# EAGLE board CT_schematic (EAGLE 7.6.0)

Size 100 x 80 mm. Coordinates in mm from the lower left corner, seen from the top.
Outline: 0,0 100,0 100,80 0,80 0,0
Copper layers (1*16): Top 0.035mm / dielectric 1.5mm / Bottom 0.035mm
Design rules "default": minimum track width 10mil, minimum drill 24mil, track to track 8mil, track to pad 8mil, pad to pad 8mil, via to via 8mil, smd to smd 8mil, copper to edge 40mil, drill to drill 8mil, minimum pad ring 10mil, minimum via ring 8mil, stop-mask expansion 4mil, vias tented up to drill 0mil, thermal gap 10mil

## Footprints (pad centres in the part's own frame; a part is rotated, then mirrored left to right if it is on the bottom)
C0603 = smd 0.8 x 0.8: 1 -0.762,0; 2 0.762,0
C0402 = smd 0.5 x 0.5: 1 -0.508,0; 2 0.508,0
C0805 = smd 1.2 x 1.3: 1 -1.016,0; 2 1.016,0
C1206 = smd 1.3 x 1.6: 1 -1.524,0; 2 1.524,0
L0603 = smd 0.8 x 0.8: 1 -0.762,0; 2 0.762,0
DR1040 = smd 1.6 x 3.2: 1 -4.458,0; 2 4.458,0
R0603 = smd 0.8 x 0.8: 1 -0.762,0; 2 0.762,0
LQFP100 = smd 0.3 x 1.2: 1 -6,-7.75; 2 -5.5,-7.75; 3 -5,-7.75; 4 -4.5,-7.75; 5 -4,-7.75; 6 -3.5,-7.75; 7 -3,-7.75; 8 -2.5,-7.75; 9 -2,-7.75; 10 -1.5,-7.75; 11 -1,-7.75; 12 -0.5,-7.75; 13 0,-7.75; 14 0.5,-7.75; 15 1,-7.75; 16 1.5,-7.75; 17 2,-7.75; 18 2.5,-7.75; 19 3,-7.75; 20 3.5,-7.75; 21 4,-7.75; 22 4.5,-7.75; 23 5,-7.75; 24 5.5,-7.75; 25 6,-7.75; 51 6,7.75; 52 5.5,7.75; 53 5,7.75; 54 4.5,7.75; 55 4,7.75; 56 3.5,7.75; 57 3,7.75; 58 2.5,7.75; 59 2,7.75; 60 1.5,7.75; 61 1,7.75; 62 0.5,7.75; 63 0,7.75; 64 -0.5,7.75; 65 -1,7.75; 66 -1.5,7.75; 67 -2,7.75; 68 -2.5,7.75; 69 -3,7.75; 70 -3.5,7.75; 71 -4,7.75; 72 -4.5,7.75; 73 -5,7.75; 74 -5.5,7.75; 75 -6,7.75 | smd 1.2 x 0.3: 26 7.75,-6; 27 7.75,-5.5; 28 7.75,-5; 29 7.75,-4.5; 30 7.75,-4; 31 7.75,-3.5; 32 7.75,-3; 33 7.75,-2.5; 34 7.75,-2; 35 7.75,-1.5; 36 7.75,-1; 37 7.75,-0.5; 38 7.75,0; 39 7.75,0.5; 40 7.75,1; 41 7.75,1.5; 42 7.75,2; 43 7.75,2.5; 44 7.75,3; 45 7.75,3.5; 46 7.75,4; 47 7.75,4.5; 48 7.75,5; 49 7.75,5.5; 50 7.75,6; 76 -7.75,6; 77 -7.75,5.5; 78 -7.75,5; 79 -7.75,4.5; 80 -7.75,4; 81 -7.75,3.5; 82 -7.75,3; 83 -7.75,2.5; 84 -7.75,2; 85 -7.75,1.5; 86 -7.75,1; 87 -7.75,0.5; 88 -7.75,0; 89 -7.75,-0.5; 90 -7.75,-1; 91 -7.75,-1.5; 92 -7.75,-2; 93 -7.75,-2.5; 94 -7.75,-3; 95 -7.75,-3.5; 96 -7.75,-4; 97 -7.75,-4.5; 98 -7.75,-5; 99 -7.75,-5.5; 100 -7.75,-6
WSON-6 = smd 0.4 x 0.6: 1 -1,-1.4; 2 0,-1.4; 3 1,-1.4; 4 1,1.4; 5 0,1.4; 6 -1,1.4 | drill 0.2 pad 0.3: P$1 0.95,0; P$2 -0.95,0; P$3 0,-0.5; P$4 0,0.5 | smd 2.4 x 1.5: PAD 0,0
SAMTEC_FTSH-105-01-L-DV-K = smd 0.762 x 2.794: 1 -2.54,-2.032; 2 -2.54,2.032; 3 -1.27,-2.032; 4 -1.27,2.032; 5 0,-2.032; 6 0,2.032; 7 1.27,-2.032; 8 1.27,2.032; 9 2.54,-2.032; 10 2.54,2.032
M10382 = smd 1 x 1: 1 0,0; 2 -1.6,0; 3 -3.2,0; 4 -3.2,-2; 5 -3.2,-3.6; 6 -3.2,-5.2; 7 -3.2,-6.8; 8 -3.2,-8.4; 9 -3.2,-10; 10 -3.2,-11.6; 11 -3.2,-13.2; 12 -3.2,-14.8; 13 -3.2,-16.4; 14 -3.2,-18; 15 -3.2,-19.6; 16 -3.2,-21.2; 17 -3.2,-22.8; 18 -0.55,-22.8; 19 1.05,-22.8; 20 2.65,-22.8; 21 5.3,-22.8; 22 5.3,-21.2; 23 5.3,-19.6; 24 5.3,-18; 25 5.3,-16.4; 26 5.3,-14.8; 27 5.3,-13.2; 28 5.3,-11.6; 29 5.3,-10; 30 5.3,-8.4; 31 5.3,-6.8; 32 5.3,-5.2; 33 5.3,-3.6; 34 5.3,-2; 35 5.3,0; 36 3.7,0
RFM75-S = smd 0.85 x 1.6: 1 1.7,0.8; 2 2.97,0.8; 3 4.24,0.8; 4 5.51,0.8; 5 6.78,0.8; 6 8.05,0.8; 7 9.32,0.8; 8 10.59,0.8
FCI_10118193-0001LF = smd 0.4 x 1.35: 1 -1.3,2.675; 2 -0.65,2.675; 3 0,2.675; 4 0.65,2.675; 5 1.3,2.675 | smd 1.6 x 1.4: 6 -3.2,2.45; 7 3.2,2.45 | smd 1.9 x 1.9: 8 -1.2,0; 9 1.2,0 | hole 0.5: -3.3,0; 3.3,0
SOT143B = smd 1 x 0.7: 1 -0.75,-1 | smd 0.6 x 0.7: 2 0.95,-1; 3 0.95,1; 4 -0.95,1
ABS07-32.768KHZ-7-T = smd 1.1 x 2.4: 1 -2.5,0; 2 0,0
ABLS-25.000MHZ-B2F-T = smd 5.6 x 2.8: 1 -3.81,0; 2 5.69,0
TSOT-23-5 = smd 1.3 x 0.62: 1 -1.31,0.95; 2 -1.31,0; 3 -1.31,-0.95; 4 1.31,-0.95; 5 1.31,0.95
DFN8_2X3MC = smd 0.813 x 0.305: 1 -1.398,0.75; 2 -1.398,0.25; 3 -1.398,-0.25; 4 -1.398,-0.75; 5 1.398,-0.75; 6 1.398,-0.25; 7 1.398,0.25; 8 1.398,0.75 | smd 1.753 x 1.549: 9 0,0
JST-2-SMD = smd 1 x 4.6: 1 -1,-3.7; 2 1,-3.7 | smd 1.6 x 3.4: NC1 -3.4,1.5; NC2 3.4,1.5
SON-6 = smd 0.55 x 0.3: 1 -0.355,0.5 | smd 0.52 x 0.3: 2 -0.37,0; 3 -0.37,-0.5; 4 0.37,-0.5; 5 0.37,0; 6 0.37,0.5
SW_4-1437565-2 = smd 1.4 x 2.1: 1 -2.23,4.55; 2 -2.23,-4.55; 3 2.23,4.55; 4 2.23,-4.55
LGM67K-G1J2-24-Z = smd 0.8 x 1.4: A -2,0; C 0,0
NC7SZ125M5X = smd 1.3 x 0.7: 1 -1.3,0.95; 2 -1.3,0; 3 -1.3,-0.95; 4 1.3,-0.95; 5 1.3,0.95

## Placement (x,y rotation side)
C1  1e-07  [C0603]  -43.18,66.04 0 top  (outside the outline)
C2  1e-07  [C0603]  -46.99,66.04 0 top  (outside the outline)
C3  1e-07  [C0603]  -50.8,66.04 0 top  (outside the outline)
C4  1e-07  [C0603]  -54.61,66.04 0 top  (outside the outline)
C5  1e-07  [C0603]  -58.42,66.04 0 top  (outside the outline)
C6  4.7e-06  [C0603]  -39.37,66.04 0 top  (outside the outline)
C7  1e-07  [C0603]  -62.23,66.04 0 top  (outside the outline)
C8  1e-08  [C0603]  -66.04,66.04 0 top  (outside the outline)
C9  1e-06  [C0603]  -69.85,66.04 0 top  (outside the outline)
C10  1e-11  [C0402]  -66.04,71.12 0 top  (outside the outline)
C11  1e-11  [C0402]  -69.85,71.12 0 top  (outside the outline)
C12  1e-11  [C0402]  -15.24,76.2 0 top  (outside the outline)
C13  1e-11  [C0402]  -19.05,76.2 0 top  (outside the outline)
C14  1e-08  [C0402]  -22.86,76.2 0 top  (outside the outline)
C15  1e-07  [C0402]  -26.67,76.2 0 top  (outside the outline)
C16  2.2e-11  [C0402]  -58.42,71.12 0 top  (outside the outline)
C17  2.2e-11  [C0402]  -62.23,71.12 0 top  (outside the outline)
C18  1e-07  [C0402]  -30.48,76.2 0 top  (outside the outline)
C19  1e-06  [C0603]  -15.24,71.12 0 top  (outside the outline)
C20  1e-05  [C0805]  -15.24,60.96 0 top  (outside the outline)
C21  1e-05  [C0805]  -20.32,60.96 0 top  (outside the outline)
C22  1e-07  [C0402]  -34.29,76.2 0 top  (outside the outline)
C23  1e-05  [C1206]  -48.26,54.61 0 top  (outside the outline)
C24  1e-05  [C1206]  -54.61,54.61 0 top  (outside the outline)
C25  1e-08  [C0402]  -38.1,76.2 0 top  (outside the outline)
C26  1e-08  [C0402]  -41.91,76.2 0 top  (outside the outline)
F1  240.0  [L0603]  -19.05,71.12 0 top  (outside the outline)
I1  2.5e-06  [DR1040]  -67.31,31.75 0 top  (outside the outline)
R2  1000.0  [R0603]  -22.86,71.12 0 top  (outside the outline)
R4  4700.0  [R0603]  -26.67,71.12 0 top  (outside the outline)
R5  2200.0  [R0603]  -30.48,71.12 0 top  (outside the outline)
R6  2200.0  [R0603]  -34.29,71.12 0 top  (outside the outline)
R7  2200.0  [R0603]  -38.1,71.12 0 top  (outside the outline)
R8  2200.0  [R0603]  -41.91,71.12 0 top  (outside the outline)
R9  10000.0  [R0603]  -53.34,60.96 0 top  (outside the outline)
R10  10000.0  [R0603]  -58.42,60.96 0 top  (outside the outline)
R11  10000.0  [R0603]  -63.5,60.96 0 top  (outside the outline)
R12  10000.0  [R0603]  -68.58,60.96 0 top  (outside the outline)
R13  5.0  [R0603]  -45.72,71.12 0 top  (outside the outline)
R14  10000.0  [R0603]  -15.24,66.04 0 top  (outside the outline)
R15  10000.0  [R0603]  -20.32,66.04 0 top  (outside the outline)
R16  220000.0  [R0603]  -38.1,60.96 0 top  (outside the outline)
R17  1000000.0  [R0603]  -33.02,60.96 0 top  (outside the outline)
R18  10000.0  [R0603]  -25.4,66.04 0 top  (outside the outline)
R19  10000.0  [R0603]  -30.48,66.04 0 top  (outside the outline)
R20  9100.0  [R0603]  -49.53,71.12 0 top  (outside the outline)
R21  680000.0  [R0603]  -43.18,60.96 0 top  (outside the outline)
R22  120000.0  [R0603]  -48.26,60.96 0 top  (outside the outline)
R23  2000.0  [R0603]  -53.34,71.12 0 top  (outside the outline)
R24  10000.0  [R0603]  -35.56,66.04 0 top  (outside the outline)
U1  STM32L151VCT6  [LQFP100]  -49.53,8.89 0 top  (outside the outline)
U2  HDC1080DMBR  [WSON-6]  -43.18,44.45 0 top  (outside the outline)
U3  FTSH-105-01-L-DV-K  [SAMTEC_FTSH-105-01-L-DV-K]  -35.56,33.02 0 top  (outside the outline)
U4  M10382  [M10382]  -19.05,24.13 0 top  (outside the outline)
U5  RFM75-S  [RFM75-S]  -36.83,3.81 0 top  (outside the outline)
U6  10118193-0001LF  [FCI_10118193-0001LF]  -34.29,43.18 0 top  (outside the outline)
U7  prtr5v0u2ax  [SOT143B]  -54.61,76.2 0 top  (outside the outline)
U8  ABS07-32.768KHZ-7-T  [ABS07-32.768KHZ-7-T]  -27.94,54.61 0 top  (outside the outline)
U9  ABLS-25.000MHZ-B2F-T  [ABLS-25.000MHZ-B2F-T]  -59.69,44.45 0 top  (outside the outline)
U10  ltc3406es5  [TSOT-23-5]  -25.4,59.69 0 top  (outside the outline)
U11  MCP73831T-2ACI/MC  [DFN8_2X3MC]  -64.77,74.93 0 top  (outside the outline)
U12  S2B-PH-SM4-TB(LF)(SN)  [JST-2-SMD]  -22.86,46.99 0 top  (outside the outline)
U13  TPS3895ADRYR  [SON-6]  -58.42,74.93 0 top  (outside the outline)
U14  4-1437565-2  [SW_4-1437565-2]  -57.15,31.75 0 top  (outside the outline)
U15  Q65110A2395  [LGM67K-G1J2-24-Z]  -36.83,54.61 0 top  (outside the outline)
U16  nc7sz125m5x  [NC7SZ125M5X]  -59.69,53.34 0 top  (outside the outline)
U17  nc7sz125m5x  [NC7SZ125M5X]  -66.04,53.34 0 top  (outside the outline)

## Library data of the parts
C1-C26 F1 I1 R2 R4-R24 U1-U17 = circuit_tree

## Nets
CLK_CRYSTAL_U1_8: C10.1 U1.8 U8.1
CLK_CRYSTAL_U1_9: C11.1 U1.9 U8.2
CLK_CRYSTAL_U1_12: C12.1 U1.12 U9.1
CLK_CRYSTAL_U1_13: C13.1 U1.13 U9.2
GND: C1.2 C2.2 C3.2 C4.2 C5.2 C6.2 C7.2 C8.2 C9.2 C10.2 C11.2 C12.2 C13.2 C14.2 C15.2 C16.2 C17.2 C18.2 C19.2 C20.2 C21.1 C21.2 C22.2 C23.2 C24.2 C25.2 C26.2 R2.2 R9.2 R13.2 R16.2 R20.2 R22.2 R23.2 U1.10 U1.19 U1.20 U1.27 U1.49 U1.74 U1.99 U2.2 U2.PAD U3.3 U3.5 U4.2 U4.4 U4.14 U4.17 U4.21 U4.24 U4.26 U4.28 U4.33 U4.34 U4.35 U4.36 U5.1 U6.5 U6.6 U6.7 U6.8 U6.9 U7.1 U10.2 U11.6 U11.9 U12.2 U13.2 U15.C U16.2 U16.3 U17.1 U17.3
INPUT_USBPOWER_5V: C23.1 R24.2 U6.1 U7.4 U11.1 U11.2
NET_U1_6: C7.1 U1.6
NET_U1_14: R4.1 U1.14 U17.4
NET_U1_22: C8.1 C9.1 F1.1 U1.21 U1.22
NET_U1_47: R7.1 U1.47 U2.6
NET_U1_48: R8.1 U1.48 U2.1
NET_U1_92: R5.1 U1.92 U4.19
NET_U1_93: R6.1 U1.93 U4.18
NET_U1_94: R9.1 U1.94
NET_U1_97: U15.A
NET_U1_98: U14.3 U14.4
NET_U3_9: R13.1 U3.9
NET_U5_3: R14.1 U5.3
NET_U10_1: U10.1
NET_U10_3: I1.1 U10.3
NET_U10_5: R16.1 R17.1 U10.5
NET_U10_ATNET_3: I1.2 R17.2
NET_U11_5: R24.1 U11.5
NET_U11_8: R23.1 U11.8
NET_U13_1: R19.1 R20.1 U13.1
NET_U13_3: R21.2 R22.1 U13.3
NET_U13_4: R18.1 U13.4 U16.4 U17.2
NET_U14_1: R2.1 U14.1 U14.2
PROC_SPI1_MISO: U1.31 U5.7
PROC_SPI1_MOSI: U1.32 U5.6
PROC_SPI1_NSS: R15.1 U1.29 U5.4
PROC_SPI1_SCK: U1.30 U5.5
PROC_SYS_JTCK_SWCLK: R11.1 U1.76 U3.4
PROC_SYS_JTDO_TRACESWO: U1.89 U3.6
PROC_SYS_JTMS_SWDIO: R12.1 U1.72 U3.2
PROC_USB_DM: U1.70 U6.2 U7.3
PROC_USB_DP: U1.71 U6.3 U7.2
RST_OUT_U3_JTAG_RST_B: R10.1 U3.10 U16.1
VCC_S1_3V7: C20.1 C24.1 U10.4 U11.3 U11.4 U12.1
VCC_TIER1_3V3: C1.1 C2.1 C3.1 C4.1 C5.1 C6.1 C14.1 C15.1 C16.1 C17.1 C18.1 C19.1 C21.2 C22.1 C25.1 C26.1 F1.2 I1.2 R4.2 R5.2 R6.2 R7.2 R8.2 R10.2 R11.2 R12.2 R14.2 R15.2 R17.2 R18.2 R19.2 R21.1 U1.11 U1.28 U1.50 U1.75 U1.100 U2.5 U3.1 U4.5 U4.25 U4.27 U5.2 U13.6 U16.5 U17.5

## Tracks (layer width: path | path; a pad name or v marks a point on that pad's centre or on a via)
CLK_CRYSTAL_U1_8  (2 unrouted)
CLK_CRYSTAL_U1_9  (2 unrouted)
CLK_CRYSTAL_U1_12  (2 unrouted)
CLK_CRYSTAL_U1_13  (2 unrouted)
GND  (73 unrouted)
INPUT_USBPOWER_5V  (5 unrouted)
NET_U1_6  (1 unrouted)
NET_U1_14  (2 unrouted)
NET_U1_22  (4 unrouted)
NET_U1_47  (2 unrouted)
NET_U1_48  (2 unrouted)
NET_U1_92  (2 unrouted)
NET_U1_93  (2 unrouted)
NET_U1_94  (1 unrouted)
NET_U1_98  (1 unrouted)
NET_U3_9  (1 unrouted)
NET_U5_3  (1 unrouted)
NET_U10_3  (1 unrouted)
NET_U10_5  (2 unrouted)
NET_U10_ATNET_3  (1 unrouted)
NET_U11_5  (1 unrouted)
NET_U11_8  (1 unrouted)
NET_U13_1  (2 unrouted)
NET_U13_3  (2 unrouted)
NET_U13_4  (3 unrouted)
NET_U14_1  (2 unrouted)
PROC_SPI1_MISO  (1 unrouted)
PROC_SPI1_MOSI  (1 unrouted)
PROC_SPI1_NSS  (2 unrouted)
PROC_SPI1_SCK  (1 unrouted)
PROC_SYS_JTCK_SWCLK  (2 unrouted)
PROC_SYS_JTDO_TRACESWO  (1 unrouted)
PROC_SYS_JTMS_SWDIO  (2 unrouted)
PROC_USB_DM  (2 unrouted)
PROC_USB_DP  (2 unrouted)
RST_OUT_U3_JTAG_RST_B  (2 unrouted)
VCC_S1_3V7  (5 unrouted)
VCC_TIER1_3V3  (45 unrouted)